# Altium PCB MyECGPCB_V1.2.9.PcbDoc (part 2 of 2)
Units mil, origin at the board's own origin, x right, y up, seen from the top; angles counter-clockwise.
Board outline 3250 x 3250 mil, 2 copper layers (Top Layer, Bottom Layer); 151 components, 107 nets, 475 pads, 167 vias.
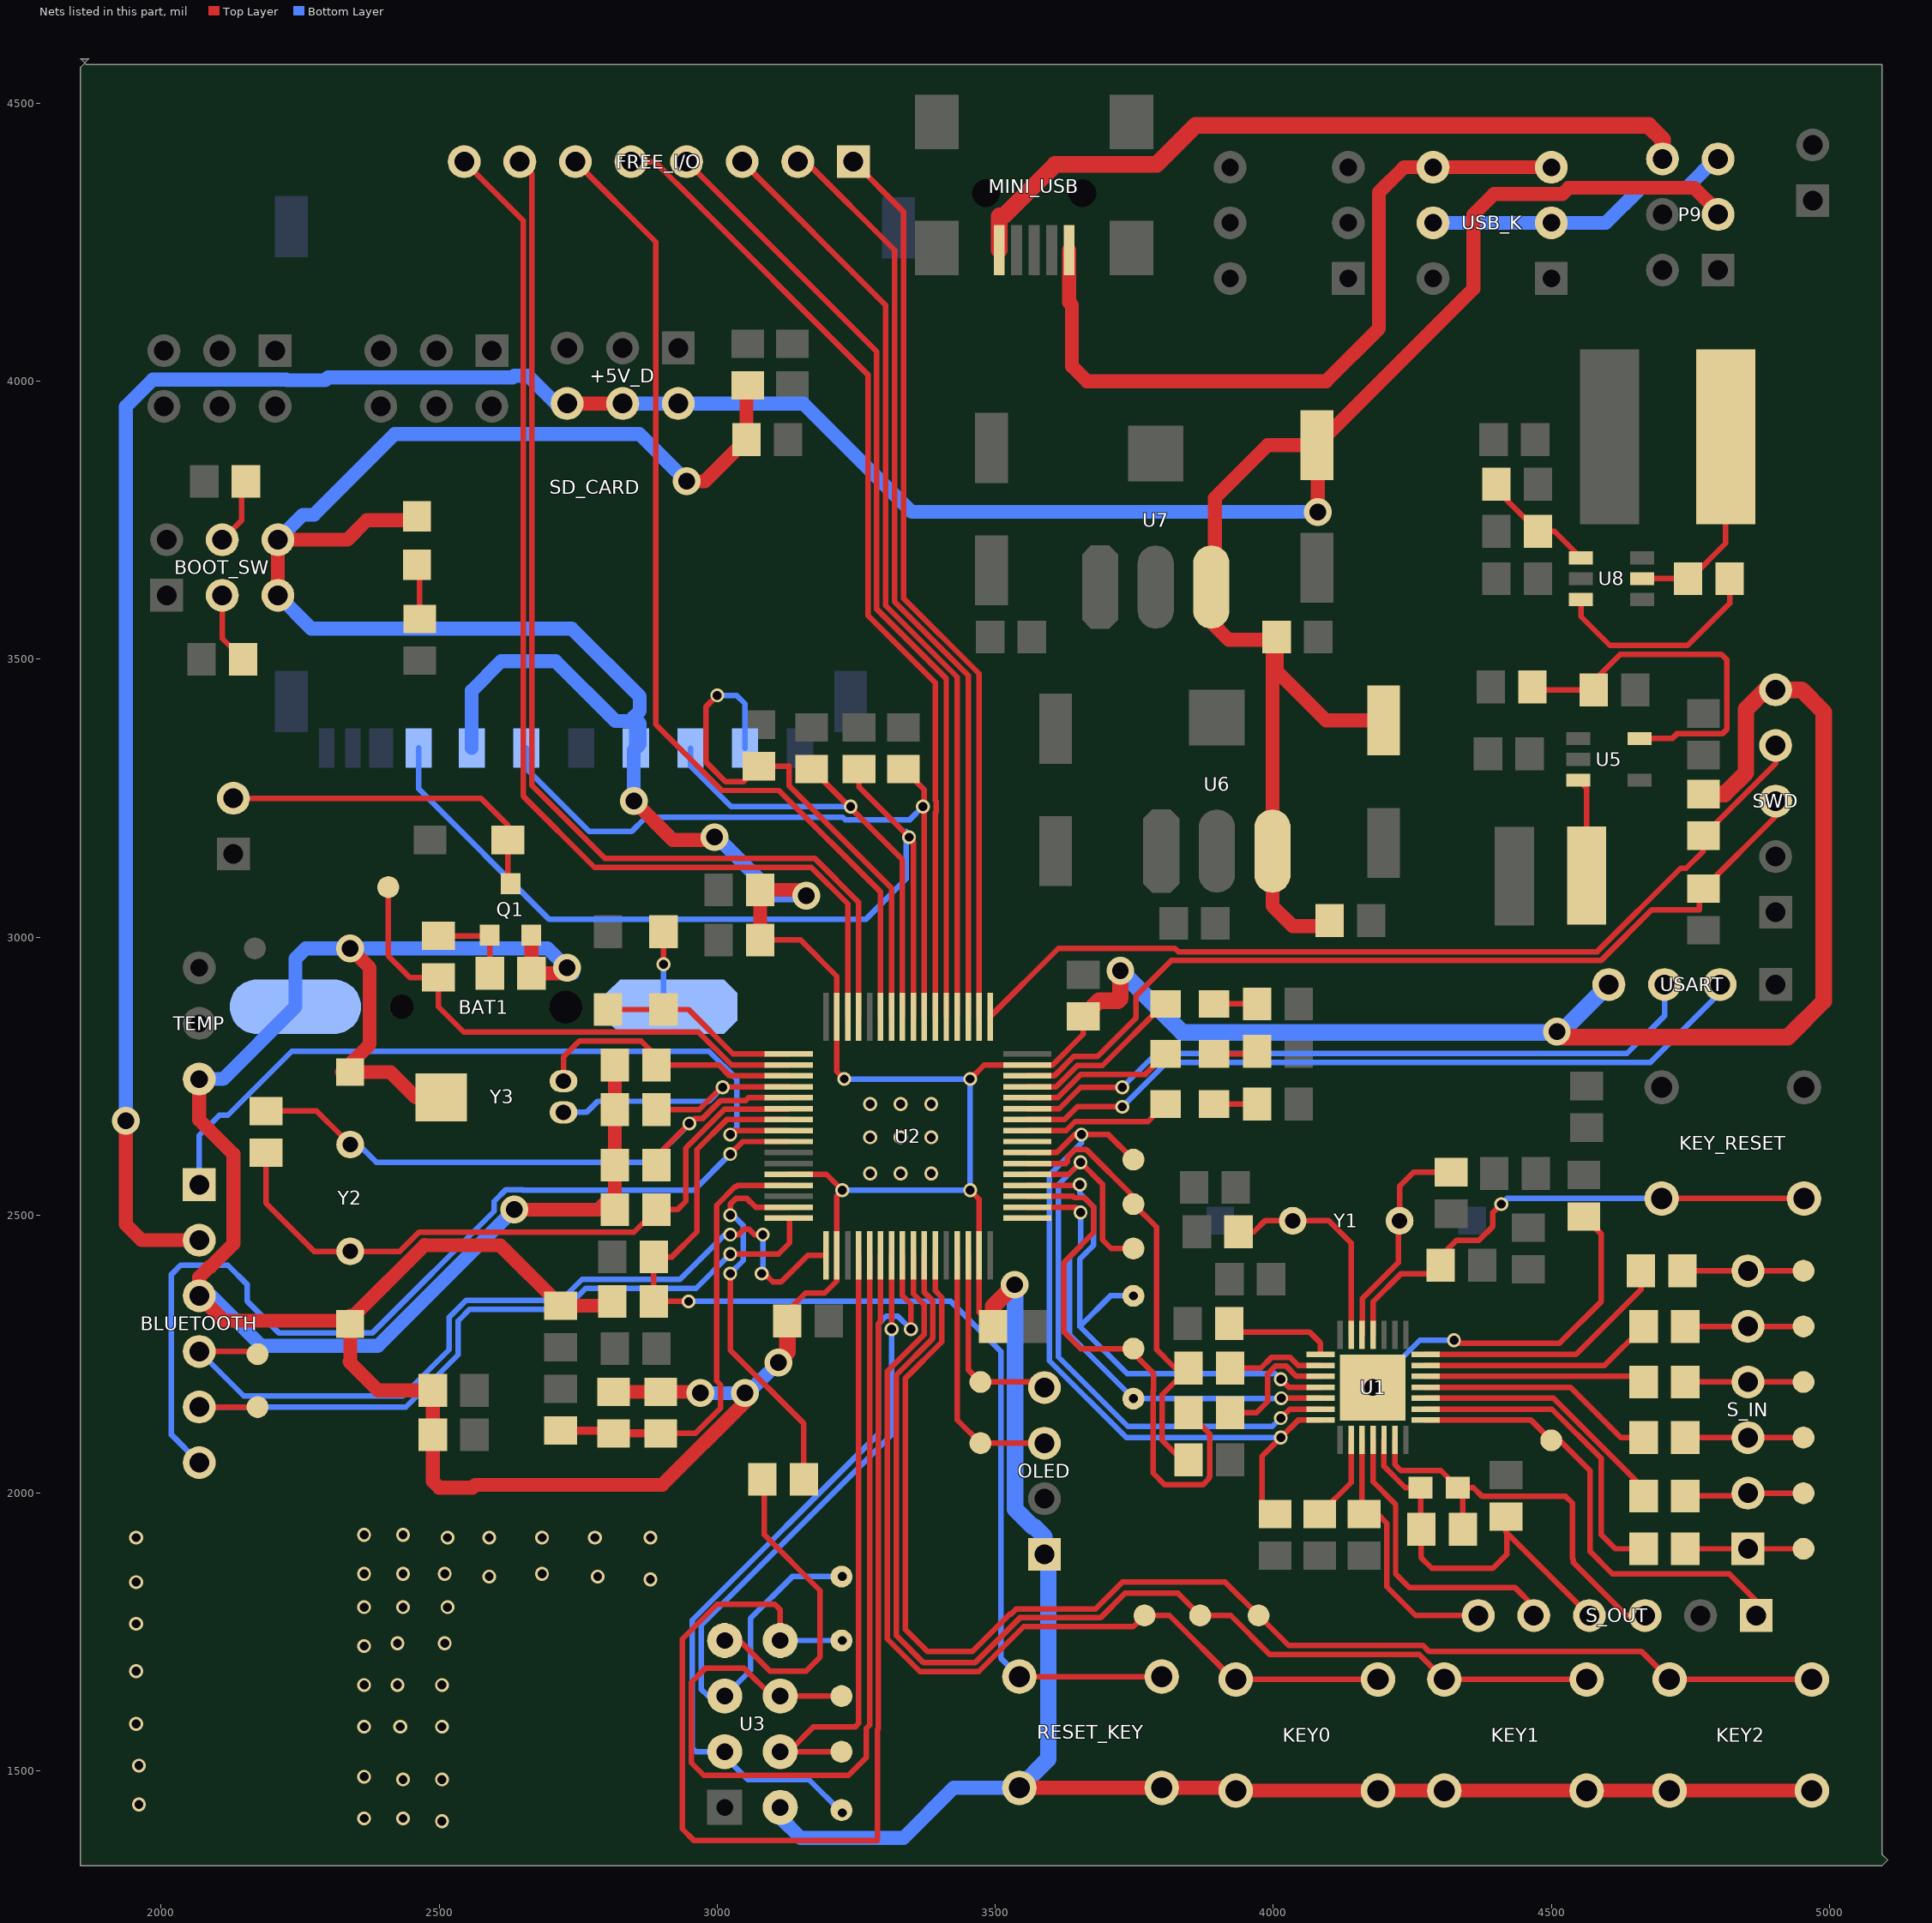
[diagram p2: the nets of this part, all layers, seen from the top]

## Via types
v1: diameter 25, hole 16, Top Layer to Bottom Layer, 114 vias
v2: diameter 50, hole 30, Top Layer to Bottom Layer, 53 vias

## Nets (pads, with @x,y where several pads share a name; then routed paths per layer and width w, separated by ;. In a path a pad name is that pad's centre, name@x,y a point inside that pad or via, vN(x,y) a via of type N, cw(c..) or ccw(c..) an arc to the next point about the centre after c; other vN are vias at no path point) (continued)
DGND: BAT1.2 BLUETOOTH.3 BOOT_SW.5 BOOT_SW.6 C9.2 C10.2 C11.2 C12.1 C13.1 C14.1 C15.1 C16.2 C17.2 C18.2 C19.2 C20.2 C21.1 C22.1 C23.1 C24.1 KEY0.1 KEY1.1 KEY2.1 OLED.1 POWER.2 Q1.1 R26.2 R35.2 R36.1 RESET_KEY.2 SD_CARD.3 SD_CARD.6 SWD.5 TEMP.1 U2.12 U2.18 U2.31 U2.47 U2.63 U3.1 USART.4 Y2. Y3. | length 16230.3
  Top Layer w10: C18.2@3077.4,2995 3150,2995 3215.11,2929.89 U2.63@3215.11,2856.93 3215.11,2758.39 v1(3228.5,2745) ; C23.1@3126.1,2310 3126.1,2327.6 3158.5,2360 3193.5,2360 3215.11,2381.61 U2.18@3215.11,2427.8 3215.11,2535.11 v1(3225,2545) 3196.54,2573.46 U2.12@3128.5,2573.46 ; v1(3455,2545) 3471.02,2528.98 U2.31@3471.02,2427.8 3471.02,2325.08 C20.2@3496.1,2300 ; v1(3455,2745) 3480.31,2770.31 U2.47@3557.63,2770.31 3603.3,2770.31 3658.5,2825.51 C19.2@3658.5,2857.6
  Top Layer w25: TEMP.1@2068.5,2745 2068.5,2671.5 2130,2610 2130,2448.58 2088.39,2406.97 2086.97,2406.97 2068.5,2388.5 BLUETOOTH.3@2068.5,2355 2113.5,2310 2330.32,2310 Y2.@2340,2319.68 ; BOOT_SW.5@2210,3605 BOOT_SW.6@2210,3715 2335,3715 2370,3750 2453.02,3750 POWER.2@2460.06,3757.04 ; v2(2340,2980) 2375,2945 2375,2807.44 2325,2757.44 2412.56,2757.44 2458,2712 Y3.@2503.5,2712 ; v2(2635,2510) 2786.1,2510 2801.1,2525 C12.1@2816.1,2510 C15.1@2816.1,2590 C13.1@2816.1,2690 C14.1@2816.1,2770 ; Q1.1@2665.9,3003.74 R35.2@2665.9,2935 2720,2935 v2(2730,2945) ; C11.2@2811.1,2345 2803.5,2337.4 C24.1@2718.5,2337.4 2609.93,2445.97 2474.03,2445.97 2473.7,2446.3 2347.08,2319.68 Y2.@2340,2319.68 ; C17.2@2813.5,2182.4 C16.2@2898.5,2182.4 2967.6,2182.4 v2(2970,2180) ; v2(2850,3245) 2920,3175 v2@2985,3175 ; v2(2945,3820) 2977.6,3820 C9.2@3052.6,3895 3052.6,3990.2 R36.1@3055,3992.6 ; v2(3050,2180) 3050,2163.68 2901.32,2015 2565,2015 2560,2010 2500,2010 2488.5,2021.5 C22.1@2488.5,2105 C21.1@2488.5,2185 2390,2185 2338.5,2236.5 2340,2238 Y2.@2340,2304.68 Y2.@2340,2319.68 ; C18.2@3077.4,2995 C10.2@3077.4,3085 3150,3085 v2(3160,3075) ; RESET_KEY.2@3543.5,1470 RESET_KEY.2@3799.41,1470 3927.59,1470 KEY0.1@3932.59,1465 KEY0.1@4188.5,1465 KEY1.1@4307.59,1465 KEY1.1@4563.5,1465 KEY2.1@4712.59,1465 KEY2.1@4968.5,1465
  Top Layer w30: v2(3110,2235) 3110,2237.8 3126.1,2253.9 C23.1@3126.1,2310 ; C20.2@3496.1,2300 3496.1,2336.1 v2(3535,2375) ; C19.2@3658.5,2857.6 3686.71,2885.81 3720.81,2885.81 3725,2890 v2(3725,2940) ; v2(4510,2830) 4520,2820 4925,2820 4990,2885 4990,3405 4950,3445 SWD.5@4903.5,3445 4885,3445 4850,3410 4850,3295.87 4811.53,3257.4 R26.2@4773.5,3257.4
  Bottom Layer w10: v1(3225,2545) v1(3455,2545) v1(3455,2745) v1@3230,2745
  Bottom Layer w25: BLUETOOTH.3@2068.5,2355 2090,2355 2180,2265 2390,2265 v2(2635,2510) ; TEMP.1@2068.5,2745 2111.48,2745 BAT1.2@2241.48,2875 2241.48,2961.48 2260,2980 v2(2340,2980) 2695,2980 v2(2730,2945) v2@2740,2935 ; BOOT_SW.5@2210,3615 2270,3555 2738.59,3555 2860.75,3432.84 2860.75,3407.16 2849.29,3395.71 2860.75,3384.25 2860.75,3347.29 SD_CARD.3@2853.82,3340.36 ; BOOT_SW.6@2210,3715 2255,3760 2275,3760 2420,3905 2860,3905 v2(2945,3820) ; SD_CARD.6@2558.54,3340.36 2558.54,3443.54 2611.5,3496.5 2709.4,3496.5 2816.9,3389 2846,3389 2853.82,3381.18 SD_CARD.3@2853.82,3340.36 ; v2(2850,3245) 2850,3336.54 SD_CARD.3@2853.82,3340.36 ; v2(2970,2180) v2(3050,2180) 3055,2180 v2(3110,2235) ; v2(2995,3180) 3000,3180 3105,3075 v2(3160,3075) ; U3.1@3113.5,1435 3113.5,1416.5 3150,1380 3335,1380 3425,1470 RESET_KEY.2@3543.5,1470
  Bottom Layer w30: v2(3535,2375) 3536,2374 3536,1971.04 3567.57,1939.47 3570.53,1939.47 3588.5,1921.5 OLED.1@3588.5,1890 3595.5,1883 3595.5,1522 RESET_KEY.2@3543.5,1470 ; v2(3725,2940) 3836,2829 4517.5,2829 USART.4@4603.5,2915
  other v1: 2505,1410 2365,1415 2435,1415 1960,1440 2435,1485 2505,1485 2365,1490 1960,1510 2365,1580 2430,1580 2505,1580 1955,1585 2365,1655 2425,1655 2505,1655 1955,1680 2365,1725 2425,1730 2510,1730 1955,1765 2365,1795 2435,1795 2515,1795 1955,1840 2880,1845 2590,1850 2785,1850 2365,1855 2435,1855 2510,1855 2685,1855 1955,1920 2515,1920 2590,1920 2685,1920 2780,1920 2880,1920 2365,1925 2435,1925 3275,2575 3330,2575 3385,2575 3275,2640 3330,2640 3385,2640 3275,2700 3330,2700 3385,2700
EN: BLUETOOTH.1 U2.8 | length 1364.7
  Top Layer w10: v1(3023.5,2645) 3030.71,2652.21 U2.8@3128.5,2652.21
  Bottom Layer w10: BLUETOOTH.1@2068.5,2545 BLUETOOTH.1@2068.5,2555 2068.5,2643.5 2077.62,2652.62 2095.88,2670.88 2105,2680 2120,2680 2235,2795 2985,2795 3035,2745 3035,2656.5 v1(3023.5,2645) v1@3020,2645
FBEEP: R34.2 T_P24.1 U2.2 | length 955.8
  Top Layer w10: T_P24.1@2408.5,3090 2408.5,2966.5 2447.4,2927.6 R34.2@2498.5,2927.6 2498.5,2875 2544.03,2829.47 2966.4,2829.47 3025.87,2770 3128.19,2770 U2.2@3128.5,2770.31
KEY0: KEY0.2 T_P14.1 U2.25 | length 1721.7
  Top Layer w10: U2.25@3352.91,2427.8 3352.91,2358.22 3372,2339.13 3372,2285.27 3306,2219.27 3306,1737.5 3364.5,1679 3470.13,1679 3551.13,1760 3748.5,1760 T_P14.1@3768.5,1780 3813.5,1780 3928.5,1665 KEY0.2@3932.59,1665 KEY0.2@4188.5,1665
KEY1: KEY1.2 T_P15.1 U2.26 | length 2095.2
  Top Layer w10: U2.26@3372.59,2427.79 3372.59,2361.16 3388,2345.75 3388,2278.64 3322,2212.64 3322,1744.13 3371.13,1695 3463.5,1695 3544.5,1776 3689.5,1776 3733.5,1820 3828.5,1820 T_P15.1@3868.5,1780 3923.5,1780 3993.5,1710 4262.59,1710 KEY1.2@4307.59,1665 KEY1.2@4563.5,1665
KEY2: KEY2.2 T_P16.1 U2.27 | length 2476
  Top Layer w10: U2.27@3392.28,2427.8 3392.28,2364.1 3404,2352.38 3404,2272.01 3338,2206.01 3338,1755.5 3378.5,1715 3458.5,1715 3525.69,1782.19 3528.06,1782.19 3537.87,1792 3680.5,1792 3728.5,1840 3913.5,1840 T_P16.1@3973.5,1780 4027.5,1726 4269.22,1726 4280.22,1715 4662.59,1715 KEY2.2@4712.59,1665 KEY2.2@4968.5,1665
LED1: DS1.2 U2.41 | length 268.7
  Top Layer w10: U2.41@3557.63,2652.21 3627.47,2652.21 3643.77,2668.5 3774.9,2668.5 DS1.2@3806.46,2700.06
LED2: DS2.2 U2.44 | length 281.5
  Top Layer w10: U2.44@3557.63,2711.26 3612.13,2711.26 3654.37,2753.5 3769.9,2753.5 DS2.2@3806.46,2790.06
LED3: DS3.2 U2.45 | length 310.6
  Top Layer w10: U2.45@3557.63,2730.95 3609.19,2730.95 3647.75,2769.5 3693,2769.5 3803.56,2880.06 DS3.2@3806.46,2880.06
NetBAT1_1: BAT1.1 D2.1 | length 141.3
  Top Layer w10: v1(2903.5,2951.5) D2.1@2903.5,3010
  Bottom Layer w10: v1(2903.5,2951.5) 2903.5,2890.15 BAT1.1@2918.65,2875
NetC6_2: C6.2 U1.24 Y1.2 | length 398.4
  Top Layer w10: U1.24@4159.76,2285 4160,2285.24 4160,2350 4225,2415 4225,2487.87 Y1.2@4227.13,2490 4227.13,2552.13 4252.4,2577.4 C6.2@4320,2577.4
NetC7_2: C7.2 U1.23 Y1.1 | length 399.5
  Top Layer w10: C7.2@3942.4,2475 C7.2@3937.4,2470 3965,2470 3985,2490 Y1.1@4035,2490 4100,2490 4140.15,2449.85 4140.15,2349.54 ; U1.23@4140.07,2285 4140.07,2349.47
NetC36_1: C36.1 L2.1 U8.2 | length 367.7
  Top Layer w10: U8.2@4663.62,3645 4750,3645 4813.5,3708.5 L2.1@4813.5,3900
NetC36_2: C36.2 U8.6 | length 395.4
  Top Layer w10: U8.6@4553.38,3607.6 4553.38,3576.62 4605,3525 4745,3525 4820.9,3600.9 C36.2@4820.9,3645
NetD3_1: BEEP.2 D3.1 Q1.3 | length 620.9
  Top Layer w10: BEEP.2@2130,3250 2575,3250 2623.5,3201.5 D3.1@2623.5,3175 2623.5,3101.26 Q1.3@2628.5,3096.26
NetDS0_1: POWER.1 R32.1 | length 99.7
  Top Layer w10: POWER.1@2460.06,3670.03 2465,3665.09 R32.1@2465,3572.4
NetDS1_1: DS1.1 R27.2 | length 77.7
  Top Layer w10: DS1.1@3893.47,2700.06 3971.04,2700.06 R27.2@3971.1,2700
NetDS2_1: DS2.1 R29.2 | length 79.7
  Top Layer w10: DS2.1@3893.47,2790.06 3966.16,2790.06 R29.2@3971.1,2795
NetDS3_1: DS3.1 R30.2 | length 77.7
  Top Layer w10: DS3.1@3893.47,2880.06 3971.04,2880.06 R30.2@3971.1,2880
NetL1_1: L1.1 U5.3 | length 177.9
  Top Layer w10: U5.3@4548.38,3282.6 4563.5,3267.48 L1.1@4563.5,3111
NetP1_1: R10.1 S_IN.1 T_P6.1 | length 212.6
  Top Layer w10: R10.1@4740.9,1900 S_IN.1@4853.5,1900 T_P6.1@4953.5,1900
NetP1_2: R9.1 S_IN.2 T_P5.1 | length 214.7
  Top Layer w10: R9.1@4740.9,1995 4848.5,1995 S_IN.2@4853.5,2000 T_P5.1@4953.5,2000
NetP1_3: R8.1 S_IN.3 T_P4.1 | length 212.6
  Top Layer w10: R8.1@4740.9,2100 S_IN.3@4853.5,2100 T_P4.1@4953.5,2100
NetP1_4: R7.1 S_IN.4 T_P3.1 | length 212.6
  Top Layer w10: R7.1@4740.9,2200 S_IN.4@4853.5,2200 T_P3.1@4953.5,2200
NetP1_5: R5.1 S_IN.5 T_P2.1 | length 212.6
  Top Layer w10: R5.1@4740.9,2300 S_IN.5@4853.5,2300 T_P2.1@4953.5,2300
NetP1_6: R3.1 S_IN.6 T_P1.1 | length 217.6
  Top Layer w10: R3.1@4735.9,2400 S_IN.6@4853.5,2400 T_P1.1@4953.5,2400
NetQ1_2: Q1.2 R34.1 R35.1 | length 161.9
  Top Layer w10: R34.1@2498.5,3002.4 2589.76,3002.4 Q1.2@2591.1,3003.74 R35.1@2591.1,2935
NetR2_2: R2.2 R4.1 T_P7.1 U2.38 | length 816.7
  Top Layer w10: U2.38@3557.63,2593.15 3626.65,2593.15 3630,2596.5 3630,2604.73 3643.77,2618.5 3663.23,2618.5 3748.5,2533.23 T_P7.1@3748.5,2520 3790,2478.5 3790,2258.5 3823.5,2225 R4.1@3847.6,2225 3800,2177.4 3800,2095 3835,2060 R2.2@3847.6,2060
NetR3_2: R3.2 U1.1 | length 469.3
  Top Layer w10: U1.1@4273.93,2249.57 4544.57,2249.57 4661.1,2366.1 R3.2@4661.1,2400
NetR4_2: R4.2 U1.20 | length 176.7
  Top Layer w10: R4.2@3922.4,2225 3977.64,2225 3997.14,2244.5 4029.86,2244.5 4044.48,2229.88 U1.20@4084.96,2229.88
NetR5_2: R5.2 U1.2 | length 421.2
  Top Layer w10: U1.2@4273.93,2229.88 4595.98,2229.88 R5.2@4666.1,2300
NetR6_1: R6.1 T_P8.1 U2.35 | length 1000.2
  Top Layer w10: U2.35@3557.63,2534.1 3639.92,2534.1 3642.52,2531.5 3660.23,2531.5 3677,2514.73 3677,2468.5 3623.5,2415 3623.5,2290 3653.5,2260 T_P8.1@3748.5,2260 3748.5,2251.5 3785,2215 3785,2185.03 3784,2184.03 3784,2036 3805,2015 3873.27,2015 3884.19,2025.92 3884.19,2028.38 3885.81,2030 3885.81,2106.79 R6.1@3847.6,2145
NetR6_2: R6.2 U1.19 | length 234
  Top Layer w10: R6.2@3922.4,2145 3970,2145 3990,2165 3990,2214.73 4003.77,2228.5 4023.23,2228.5 4041.73,2210 4084.76,2210 U1.19@4084.96,2210.2
NetR7_2: R7.2 U1.3 | length 396.4
  Top Layer w10: U1.3@4273.93,2210.2 4655.9,2210.2 R7.2@4666.1,2200
NetR8_2: R8.2 U1.4 | length 429.7
  Top Layer w10: U1.4@4273.93,2190.51 4534.49,2190.51 4625,2100 R8.2@4666.1,2100
NetR9_2: R9.2 U1.5 | length 473.1
  Top Layer w10: U1.5@4273.93,2170.83 4504.17,2170.83 4666.1,2008.9 R9.2@4666.1,1995
NetR10_2: R10.2 U1.6 | length 576.7
  Top Layer w10: U1.6@4273.93,2151.14 4501.23,2151.14 4590,2062.37 4590,1925 4615,1900 R10.2@4666.1,1900
NetR11_1: R11.1 T_P10.1 U1.15 U2.39 | length 1372.3
  Top Layer w10: U2.39@3557.63,2612.83 3610.73,2612.83 3642.89,2645 v1(3655,2645) 3703.5,2645 T_P10.1@3748.5,2600 ; R11.1@4003.5,1962.4 3980,1985.9 3980,2066.5 v1(4013.5,2100) 4044.96,2131.46 U1.15@4084.96,2131.46
  Bottom Layer w10: v1(3655,2645) 3655,2629.73 3597.5,2572.23 3597.5,2238.31 3735.81,2100 v1(4013.5,2100)
NetR14_2: R14.2 U1.21 | length 199
  Top Layer w10: R14.2@3920.9,2305 3935.9,2290 4065,2290 4085,2270 U1.21@4084.96,2249.57 U1.21@4084.96,2249.57
NetR15_1: R15.1 U1.13 | length 157.1
  Top Layer w10: R15.1@4083.5,1962.4 4140.07,2018.98 U1.13@4140.07,2096.02
NetR17_1: R17.1 U1.29 | length 645.5
  Top Layer w10: v1(4325,2275) 4330,2270 4515,2270 4590,2345 4590,2466.1 R17.1@4558.5,2497.6
  Bottom Layer w10: v2(4178.5,2190) 4263.5,2275 v1(4325,2275)
NetR21_1: BOOT_SW.3 R21.1 | length 141.2
  Top Layer w10: BOOT_SW.3@2110,3615 2110,3537.4 R21.1@2147.4,3500 R21.1@2155,3507.6
NetR22_2: BOOT_SW.4 R22.2 | length 122.6
  Top Layer w10: BOOT_SW.4@2110,3715 2145,3750 2145,3812.6 R22.2@2152.4,3820
NetR33_1: R33.1 U3.8 | length 567.7
  Top Layer w10: U3.8@3013.5,1735 3040,1735 3095,1680 3160,1680 3185,1705 3185,1825 3085,1925 3085,2021.1 R33.1@3081.1,2025
NetR38_1: R38.1 R39.2 U5.5 | length 681.4
  Top Layer w10: R38.1@4465.9,3450 4470.9,3445 R39.2@4576.1,3445 4576.1,3461.1 4624,3509 4806,3509 4816,3499 4816,3374.23 4807.58,3365.81 4725.81,3365.81 4717.4,3357.4 U5.5@4658.62,3357.4
NetR40_1: R40.1 R41.2 U8.4 | length 213.2
  Top Layer w10: R40.1@4401.1,3815 4401.1,3804.8 R41.2@4475.9,3730 4505.78,3730 U8.4@4553.38,3682.4
NetT_P9_1: T_P9.1 U1.18 U2.36 | length 971.5
  Top Layer w10: U2.36@3557.63,2553.78 3651.03,2553.78 v1(3652.25,2555) ; v1(4013.5,2205) 4027.99,2190.51 U1.18@4084.96,2190.51
  Bottom Layer w10: v1@3648.5,2555 v1(3652.25,2555) 3652.25,2539.48 3677,2514.73 3677,2445.87 3652.25,2421.12 3652.25,2300 ; v1(3748.5,2355) 3707.25,2355 3652.25,2300 ; v1(4013.5,2205) 4003.5,2215 3737.25,2215 3652.25,2300
NetT_P11_1: T_P11.1 U1.16 U2.37 | length 1225.3
  Top Layer w10: U2.37@3557.63,2573.46 3631.96,2573.46 v1(3653.5,2595) 3693,2555.5 3693,2455.5 3708.5,2440 T_P11.1@3748.5,2440 ; v1(4013.5,2135) 4029.64,2151.14 U1.16@4084.96,2151.14
  Bottom Layer w10: v1(3653.5,2595) 3613.5,2555 3613.5,2244.94 3738.44,2120 3998.5,2120 v1(4013.5,2135)
NetT_P12_1: T_P12.1 U1.17 U2.34 | length 840.2
  Top Layer w10: U2.34@3557.63,2514.41 3644.09,2514.41 v1(3653.5,2505) ; v1(3748.5,2170) T_P12.1@3748.5,2185 ; v1(4014.33,2170.83) U1.17@4084.96,2170.83
  Bottom Layer w10: v1(3653.5,2505) 3653.5,2445 3633.5,2425 3633.5,2285 3742.94,2175.56 v1@3748.5,2175.56 ; v1(3748.5,2170) 4013.5,2170 v1(4014.33,2170.83)
NRF_CE: T_P21.1 U2.20 U3.3 | length 1098.9
  Top Layer w10: U3.3@3113.5,1535 U3.3@3128.5,1535 ; T_P21.1@3223.5,1535 U3.3@3128.5,1535 ; U2.20@3254.48,2427.8 3254.48,1585.98 3248.5,1580 3173.5,1580 U3.3@3128.5,1535
NRF_CS: T_P22.1 U2.24 U3.4 | length 1438.1
  Top Layer w10: U2.24@3333.22,2427.8 3333.22,2355.28 3348.5,2340 v1(3348.5,2295)
  Bottom Layer w10: v1(3225,1425) 3165,1485 3055,1485 3013.5,1526.5 U3.4@3013.5,1535 2961.89,1535 2955,1541.88 2955,1771.5 3290,2106.5 3290,2304.73 3303.77,2318.5 3325,2318.5 v1(3348.5,2295)
NRF_IRQ: R33.2 U2.15 | length 687.8
  Top Layer w10: v1(3023.5,2395) 3023.5,2257.41 3155.9,2125.01 R33.2@3155.9,2025 ; v1(3023.5,2500) 3023.5,2520 3033.5,2530 3053.5,2530 3069.09,2514.41 U2.15@3128.5,2514.41
  Bottom Layer w10: v1(3023.5,2395) 3047,2418.5 3047,2481.5 3028.5,2500 v1(3023.5,2500)
OSC32: C14.2 U2.3 Y3.2 | length 504.5
  Top Layer w10: Y3.2@2723.5,2741 2723.5,2785 2751.97,2813.47 2863.5,2813.47 2890.9,2786.07 C14.2@2890.9,2770 ; C14.2@2890.9,2750 2910.9,2770 3003.25,2770 3022.62,2750.63 U2.3@3128.5,2750.63
OSC33: C13.2 U2.4 Y3.1 | length 559.7
  Top Layer w10: C13.2@2890.9,2690 2967.38,2690 3008.33,2730.94 U2.4@3128.5,2730.94
  Bottom Layer w10: Y3.1@2723.5,2685 2765,2685 2785,2705 2985,2705 v1(3010,2730)
OSCIN: C15.2 R28.2 U2.5 Y2.2 | length 1120
  Top Layer w10: R28.2@2188.5,2687.4 2279.72,2687.4 2325,2642.13 Y2.2@2340,2642.13 ; C15.2@2886.77,2590 C15.2@2890.9,2590 2890.9,2605.9 2959,2674 2974.01,2674 3006.51,2706.5 3051.5,2706.5 3056.26,2711.26 U2.5@3128.5,2711.26
  Bottom Layer w10: Y2.2@2347.12,2635 2387.12,2595 2880,2595 v1(2950,2665)
OSCOUT: C12.2 R28.1 U2.6 Y2.1 | length 1229.6
  Top Layer w10: R28.1@2188.5,2612.6 2188.5,2521.5 2275,2435 2429.17,2435 2463.97,2469.8 2483.43,2469.8 2483.76,2469.47 2850.37,2469.47 C12.2@2890.9,2510 2928.5,2510 2943.5,2525 2943.5,2620.86 3013.14,2690.5 3127.42,2690.5 U2.6@3128.5,2691.58
PA15: FREE_I/O.1 U2.50 | length 1631.7
  Top Layer w10: FREE_I/O.1@3245,4395 3335,4305 3335,3610 3471.02,3473.98 U2.50@3471.02,2856.93
PB7: FREE_I/O.6 U2.59 | length 1825.5
  Top Layer w10: FREE_I/O.6@2745,4395 2889.47,4250.53 2889.47,3382.9 3008.37,3264 3111,3264 3293.85,3081.15 U2.59@3293.85,2856.93
PB8: FREE_I/O.7 U2.61 | length 2011.6
  Top Layer w10: FREE_I/O.7@2645,4395 2667,4373 2667,3273 2798.47,3141.53 3175.84,3141.53 3254.48,3062.89 U2.61@3254.48,2856.93
PB9: FREE_I/O.8 U2.62 | length 2052.1
  Top Layer w10: FREE_I/O.8@2545,4395 2651,4289 2651,3254 2779.47,3125.53 3169.22,3125.53 3234.8,3059.95 U2.62@3234.8,2856.93
PB12: U2.33
PC9: U2.40
PC10: FREE_I/O.2 U2.51 | length 1673.7
  Top Layer w10: FREE_I/O.2@3145,4395 3160,4395 3319,4236 3319,3603.37 3451.33,3471.04 U2.51@3451.33,2856.93
PC11: FREE_I/O.3 U2.52 | length 1698.2
  Top Layer w10: FREE_I/O.3@3045,4395 3303,4137 3303,3596.75 3431.65,3468.1 U2.52@3431.65,2856.93
PC12: FREE_I/O.4 U2.53 | length 1731.5
  Top Layer w10: FREE_I/O.4@2945,4395 3287,4053 3287,3590.12 3411.96,3465.15 U2.53@3411.96,2856.93
PD2: FREE_I/O.5 U2.54 | length 1791
  Top Layer w10: FREE_I/O.5@2845,4395 2887.69,4395 2928.21,4354.47 2928.6,4354.47 3271,4012.08 3271,3579 3392.28,3457.72 3392.28,3245.95 3393.5,3244.73 3393.5,3225.27 3392.28,3224.05 U2.54@3392.28,2856.93
RESET: C11.1 R18.1 RESET_KEY.1 U2.7 | length 2031.4
  Top Layer w10: v1(2948.5,2345) C11.1@2885.9,2345 R18.1@2885.9,2425 2918.5,2425 2963.5,2470 2963.5,2618.23 3017.16,2671.89 U2.7@3128.5,2671.89 ; RESET_KEY.1@3543.5,1670 RESET_KEY.1@3799.41,1670
  Bottom Layer w10: v1@2945,2345 v1(2948.5,2345) 3420,2345 3510,2255 3510,1703.5 RESET_KEY.1@3543.5,1670
RLDIN: S_OUT.5 U1.11 | length 547.1
  Top Layer w10: U1.11@4179.44,2096.02 4179.44,2020.56 4220.03,1979.97 4220.03,1854.97 4245,1830 4435,1830 4468.5,1796.5 S_OUT.5@4468.5,1780
RLDINV: C4.2 R12.1 R13.1 S_OUT.4 U1.10 | length 706.4
  Top Layer w10: U1.10@4199.13,2096.02 4199.13,2048.24 4237.37,2010 C4.2@4265.04,2010 4265.04,1936.06 R13.1@4266.1,1935 4266.1,1883.9 4285,1865 4395,1865 4420,1890 4420,1928.5 ; R12.1@4418.5,1957.6 4418.5,1930 4420,1928.5 ; S_OUT.4@4568.5,1780 4420,1928.5
RLDOUT: C4.1 R13.2 S_OUT.3 U1.9 | length 747.1
  Top Layer w10: U1.9@4218.81,2096.02 4218.81,2051.18 4229.31,2040.69 4301.28,2040.69 C4.1@4331.96,2010 ; R13.2@4340.9,1935 4340.9,2001.06 C4.1@4331.96,2010 ; S_OUT.3@4668.5,1780 4635,1780 4540,1875 4540,1879.75 4538,1881.75 4538,1982 4525.81,1994.19 4375.81,1994.19 4360,2010 C4.1@4331.96,2010
RLDREF: C5.1 S_OUT.6 U1.12 | length 482.6
  Top Layer w10: U1.12@4159.76,2096.02 4159.76,1966.14 C5.1@4163.5,1962.4 4187.6,1962.4 4204.03,1945.97 4204.03,1831.88 4255.91,1780 S_OUT.6@4368.5,1780
RSTB: KEY_RESET.2 R16.1 U1.25 | length 935.3
  Top Layer w10: U1.25@4179.44,2285 4179.44,2344.45 4230,2395 4286.1,2395 R16.1@4301.1,2410 4301.1,2426.1 4330,2455 4370,2455 4395,2480 4395,2505 v1(4410,2520) ; KEY_RESET.2@4698.5,2530 KEY_RESET.2@4954.41,2530
  Bottom Layer w10: v1(4410,2520) 4420,2530 KEY_RESET.2@4698.5,2530
SCL: OLED.3 T_P27.1 U2.29 | length 470.1
  Top Layer w10: U2.29@3431.65,2427.79 3431.65,2131.85 T_P27.1@3473.5,2090 OLED.3@3588.5,2090
SD_CS: R19.1 SD_CARD.1 U2.58 | length 966.8
  Top Layer w10: v1(3000,3435) 2980,3415 2980,3315 3015,3280 3047.4,3280 R19.1@3075,3307.6 3129.47,3307.6 3129.47,3272.45 3313.54,3088.38 U2.58@3313.54,2856.93
  Bottom Layer w10: v1(3000,3435) 3035,3435 3050,3420 SD_CARD.1@3050,3340
SDA: OLED.4 T_P25.1 U2.30 | length 356.1
  Top Layer w10: U2.30@3451.33,2427.8 3451.33,2222.17 T_P25.1@3473.5,2200 3578.5,2200 OLED.4@3588.5,2190
SPI1_M0SI: T_P20.1 U2.23 U3.6 | length 1325.2
  Top Layer w10: v1(3313.5,2295) U2.23@3313.54,2427.79 U2.23@3313.54,2427.79
  Bottom Layer w10: v1(3225,1850) 3135,1850 3060,1775 3060,1681.5 U3.6@3013.5,1635 2983.5,1635 2971,1647.5 2971,1762.5 3313.5,2105 v1(3313.5,2295)
SPI1_MISO: T_P19.1 U2.22 U3.7 | length 2128.7
  Top Layer w10: U3.7@3113.5,1735 3113.5,1790 3103.5,1800 3000,1800 2937.5,1737.5 2937.5,1396 2958.5,1375 3288.5,1375 3288.5,1574.75 3290,1576.25 3290,2304.73 3293.85,2308.59 U2.22@3293.85,2427.8
  Bottom Layer w10: U3.7@3113.5,1735 v1(3225,1735)
SPI1_SCK: T_P23.1 U2.21 U3.5 | length 1689
  Top Layer w10: T_P23.1@3223.5,1635 U3.5@3113.5,1635 3098.5,1635 3048.5,1685 2978.5,1685 2953.5,1660 2953.5,1515 2976,1492.5 3236,1492.5 3268.5,1525 3268.5,1577.37 3274,1582.87 3274,2427.63 U2.21@3274.17,2427.8
SPI3_MISO: R25.1 SD_CARD.7 U2.56 | length 1649.1
  Top Layer w10: R25.1@3255,3302.6 3255,3270 3352.91,3172.09 U2.56@3352.91,2856.93
  Bottom Layer w10: SD_CARD.7@2463.07,3340.36 2463.07,3266.93 2698,3032 3267,3032 3340,3105 v1@3340,3190
  other v1: 3345,3180
SPI3_MOSI: R20.1 SD_CARD.2 U2.57 | length 863.5
  Top Layer w10: R20.1@3170,3302.6 3333.22,3139.37 U2.57@3333.22,2856.93
  Bottom Layer w10: SD_CARD.2@2952,3340 2952,3308 3025,3235 v1(3240,3235)
SPI3_SCK: R23.1 SD_CARD.5 U2.55 | length 1280.8
  Top Layer w10: R23.1@3335,3302.6 3372.59,3265 U2.55@3372.59,2856.93
  Bottom Layer w10: SD_CARD.5@2656.97,3340.36 2656.97,3303.03 2770,3190 2845.91,3190 2871.91,3216 3225.77,3216 3230.27,3211.5 3346.5,3211.5 v1(3370,3235)
STATE: BLUETOOTH.6 U2.9 | length 1697.6
  Top Layer w10: v1(3023.5,2610) 3046.02,2632.52 U2.9@3128.5,2632.52
  Bottom Layer w10: BLUETOOTH.6@2068.5,2055 2018.5,2105 2018.5,2393.5 2035,2410 2120,2410 2155,2375 2155,2345 2211.5,2288.5 2380.27,2288.5 2599,2507.23 2599,2524.91 2620.09,2546 2649.91,2546 2650.91,2545 2958.5,2545 v1(3023.5,2610)
SWCLK: R26.1 SWD.4 U2.49 | length 1655.1
  Top Layer w10: U2.49@3490.7,2856.93 3613.77,2980 3823.5,2980 3829.5,2974 4582.56,2974 4732.55,3123.99 4742.49,3123.99 4773.5,3155 R26.1@4773.5,3182.6 4903.5,3312.6 SWD.4@4903.5,3345
SWDIO: R24.1 SWD.3 U2.46 | length 1608.4
  Top Layer w10: U2.46@3557.63,2750.63 3606.25,2750.63 3641.12,2785.5 3684,2785.5 3753.5,2855 3753.5,2895.22 3816.28,2958 4589.19,2958 4680.37,3049.19 4766.1,3049.19 4766.1,3080 R24.1@4773.5,3087.4 4903.5,3217.4 SWD.3@4903.5,3245
UART1_RX: U2.43 USART.3 | length 1271.5
  Top Layer w10: U2.43@3557.63,2691.58 3615.08,2691.58 3653.5,2730 v1(3728.5,2730)
  Bottom Layer w10: v1(3728.5,2730) 3789.5,2791 4636,2791 4703.5,2858.5 USART.3@4703.5,2915
UART1_TX: U2.42 USART.2 | length 1355.4
  Top Layer w10: U2.42@3557.63,2671.89 3624.53,2671.89 3647.64,2695 v1(3728.5,2695)
  Bottom Layer w10: v1(3728.5,2695) 3808.5,2775 4678.5,2775 4803.5,2900 USART.2@4803.5,2915
UART2_RX: BLUETOOTH.5 T_P18.1 U2.16 | length 1369.7
  Top Layer w10: BLUETOOTH.5@2068.5,2155 T_P18.1@2173.5,2155 ; v1(3023.5,2430) 3110,2430 3130,2450 3130,2493.22 U2.16@3128.5,2494.73
  Bottom Layer w10: BLUETOOTH.5@2068.5,2155 2440,2155 2534,2249 2534,2309.91 2555.09,2331 2726,2331 2763.5,2368.5 2962,2368.5 v1(3023.5,2430)
UART2_TX: BLUETOOTH.4 T_P17.1 U2.17 | length 1521.7
  Top Layer w10: BLUETOOTH.4@2068.5,2255 2168.5,2255 T_P17.1@2173.5,2250 ; v1(3023.5,2465) 3038.12,2465 3048.12,2475 3057.38,2475 3067.38,2465 v1(3082,2465) v1@3085,2465 ; v1(3080,2395) 3085,2395 3100,2380 3115,2380 3162.8,2427.8 U2.17@3195.43,2427.8
  Bottom Layer w10: BLUETOOTH.4@2068.5,2255 2148.5,2175 2435,2175 2518,2258 2518,2316.54 2548.46,2347 2719.37,2347 2756.87,2384.5 2933,2384.5 v1@3013.5,2465 ; v1(3080,2395) 3082,2397 v1(3082,2465)
USB+: MINI_USB.1 USB_K.3 USB_K.4 | length 1387.2
  Top Layer w25: MINI_USB.1@3632.99,4235.94 3632.99,4142.01 3637.99,4137.01 3637.99,4027.01 3665,4000 4095,4000 4190,4095 4190,4340 4235,4385 USB_K.4@4287.4,4385 USB_K.3@4500,4385
USB+_K: P9.5 USB_K.2 USB_K.5 | length 558.8
  Bottom Layer w25: USB_K.5@4287.4,4285 USB_K.2@4500,4285 4598.03,4285 4661.06,4348.03 4743.03,4348.03 P9.5@4797.5,4402.5
USB-: MINI_USB.5 P9.6 | length 1361.8
  Top Layer w30: MINI_USB.5@3507.01,4235.94 3507.01,4296.87 3507.57,4297.43 3515.18,4297.43 3607.75,4390 3790,4390 3860,4460 4675,4460 4700,4435 P9.6@4700,4405
V+: +5V_D.2 +5V_D.4 +5V_D.6 BLUETOOTH.2 C25.1 C26.2 C28.1 C29.2 P9.3 U6.3 U7.3 | length 6485.5
  Top Layer w25: v2(1936.5,2670) 1936.5,2483.5 1965,2455 BLUETOOTH.2@2068.5,2455 ; +5V_D.6@2730,3960 +5V_D.4@2830,3960 ; v2(4080,3765) 4080,3883.5 C28.1@4078.5,3885 ; C26.2@4101.1,3030 4091.1,3020 4035,3020 3998.53,3056.47 U6.3@3998.53,3154.94 C29.2@3998.53,3532.43 ; C25.1@4198.5,3390 4095,3390 4006.1,3478.9 C29.2@4006.1,3540 C29.2@3998.53,3532.43 ; P9.3@4800,4305 4756.97,4348.03 4530.95,4348.03 4519.89,4336.97 4396.97,4336.97 4360,4300 4360,4166.5 C28.1@4078.5,3885 ; C29.2@3998.53,3532.43 3995.97,3535 3920,3535 3888.53,3566.47 U7.3@3888.53,3629.94 3895,3636.4 3895,3790 3990,3885 C28.1@4078.5,3885
  Bottom Layer w25: v2(1936.5,2670) 1936.5,3954.42 1985.11,4003.03 2224.89,4003.03 2225.95,4001.97 2295.22,4001.97 2300.22,4006.97 2632.19,4006.97 2635.22,4010 2660,4010 2710,3960 +5V_D.6@2730,3960 ; +5V_D.4@2830,3960 +5V_D.2@2930,3960 3155,3960 3350,3765 v2(4080,3765)
VBAT: D1.2 D2.2 U2.1 | length 358.1
  Top Layer w10: D1.2@2803.5,2870 D2.2@2903.5,2870 2948.5,2870 3028.5,2790 U2.1@3128.5,2790
VDDA: C16.1 C17.1 R31.1 U2.13 | length 820.7
  Top Layer w10: C16.1@2898.5,2107.6 2960.69,2107.6 3006,2152.91 3006,2194.91 2999,2201.91 2999,2518.13 3032.37,2551.5 3034.73,2551.5 3037.01,2553.78 U2.13@3128.5,2553.78
  Top Layer w15: R31.1@2718.5,2112.6 2808.5,2112.6 C17.1@2813.5,2107.6 C16.1@2898.5,2107.6
WCT: S_OUT.1 T_P13.1 U1.7 | length 840.6
  Top Layer w10: U1.7@4273.93,2131.46 4463.54,2131.46 T_P13.1@4500,2095 4515,2095 4570,2040 4570,1895 4610,1855 4820,1855 4868.5,1806.5 S_OUT.1@4868.5,1780
pads on no net: BAT1.0 BAT_K.1 BAT_K.6 MINI_USB.2 MINI_USB.3 MINI_USB.4 MINI_USB.6 MINI_USB.7 MINI_USB.8 MINI_USB.9 MINI_USB.MH1 MINI_USB.MH2 SD_CARD.8 SD_CARD.9 SD_CARD.10 SD_CARD.11 SD_CARD.12 U2.11 U2.14 USB_K.1 USB_K.6 Y1.

## Polygon pours and split planes (outlines as drawn)
DGND on Top Layer "Top Layer-DGND" (solid, remove dead copper, pour order 68): 1855,4575 1860,4580 3290,4580 3290,3609.75 3303,3596.75 3430,3469.75 3430,3460 3430,2915 3625,2915 3625,1690 3635,1680 3640,1675 5105,1675 5105,1330 1850,1330 1850,4580
BAT- on Top Layer "Top Layer-BAT-" (solid, remove dead copper, pour order 58): 3375,4580 5105,4580 5105,2965 5065,3005 3515,3005 3515,3460 3365,3610 3380,3625 3380,4580
AGND on Top Layer "Top Layer-AGND" (solid, remove dead copper, pour order 56): 5105,2870 5100,2865 4120,2865 4120,2600 4125,2595 4100,2620 3695,2620 3695,1740 3710,1725 5105,1725 5105,2865
BAT- on Bottom Layer "Bottom Layer-BAT-" (solid, remove dead copper, pour order 62): 3375,4580 5105,4580 5105,2965 5100,2960 3525,2960 3525,3440 3500,3465 3365,3600 3365,3610 3365,4575 3370,4580
AGND on Bottom Layer "Bottom Layer-AGND" (solid, remove dead copper, pour order 64): 5105,2865 5100,2870 4130,2870 4130,2595 3720,2595 3720,1730 5105,1730 5105,2865
DGND on Bottom Layer "Bottom Layer-DGND" (solid, remove dead copper, pour order 66): 1850,4580 3285,4580 3285,3615 3310,3590 3455,3445 3475,3445 3475,2945 3470,2940 3490,2920 4080,2920 4080,2685 4090,2675 4070,2695 3650,2695 3650,1690 5105,1690 5105,1330 5095,1340 1850,1340 1850,4580

## Keep-outs
Keep-Out Layer:
  lines w10: 5105,1330 1850,1330 1850,4580 5105,4580 5105,1335

## Other copper
Top Layer:
  rectangle net BAT-: 3880,2350 3950,2415
  rectangle net BAT-: 3810,2270 3880,2415
  rectangle net BAT-: 4085,2075 4125,2120
  rectangle net BAT-: 4010,2030 4125,2075
  rectangle net BAT-: 4525,2695 4990,2775
  rectangle net +3.3V_A: 4250,2645 4465,2875
  rectangle net +3.3V_D: 3960,2305 4125,2425
  rectangle net +3.3V_D: 3635,1855 3935,2000
  rectangle net +3.3V_D: 3880,1855 4115,1925
  rectangle net +2.4V_A: 4420,2350 4575,2440
  rectangle net RLDINV: 4385,1860 4495,1980
  rectangle net RLDINV: 4235,1860 4495,1890
  rectangle net RLDINV: 4235,1875 4300,2020
  rectangle net +2.4V_A: 4325,3285 4420,3330
  rectangle net +2.4V_A: 4330,2990 4505,3285
  rectangle net +2.4V_A: 4280,3330 4420,3505
  rectangle net AGND: 4625,3380 4800,3490
  rectangle net +3.3V_A: 4525,3350 4570,3405
  rectangle net +3.3V_A: 4465,3375.53 4530.26,3410
  rectangle net +3.3V_A: 4735,3300 4820,3350
  rectangle net +3.3V_A: 4640,3200 4735,3335
  rectangle net BAT+_K: 4670,3685 4740,3800
  rectangle net BAT+_K: 4630,3665 4710,3720
  rectangle net BAT_IN+: 4445,3785 4660,3965
  rectangle net BAT+_K: 4445,3610 4525,3675
  rectangle net BAT-: 4275,3865 4425,3925
  rectangle net BAT-: 4275,3720 4365,3925
  rectangle net BAT-: 4060,3520 4430,3725
  rectangle net BAT-: 3710,3065 3845,3290
  rectangle net BAT-: 4150,2990 4310,3310
  rectangle net +3.3V_A: 3575,3305 3950,3445
  rectangle net +3.3V_A: 3860,2995 3950,3450
  rectangle net V+: 3998.53,2995 4120,3115
  rectangle net BAT-: 3360,3605 3725,3770
  rectangle net +3.3V_D: 3540,3465 3840,3540
  rectangle net +3.3V_D: 3745,3480 3840,3785
  rectangle net +3.3V_D: 3385,3785 3840,3975
  rectangle net V+: 3850,3735 4130,3980
  rectangle net V+: 4006.1,3325 4200,3478.9
  rectangle net V+: 3965,3065 4045,3532.43
  rectangle net V+: 3855,3535 4035,3915

## Silkscreen, mask and mechanical layers (free items; w line width, h text height)
Top Overlay:
  drawing of 1743 lines, arcs and shapes, not listed
  text "POWER_SW" at 4625,4510 h40
  text "+" at 4960,4490 h40
  text "ECG_V1.9_ZZU_WFY" at 1930,4250 h40
  text "-" at 4965,4230 h40
  text "-" at 1880,4055 h40
  text "+" at 1885,3935 h40
  text "1" at 2210,3805 h40
  text "GND" at 2320,3585 h40 r90
  text "2" at 2210,3480 h40
  text "GND" at 4975,3425 h40
  text "CLK" at 4975,3330 h40
  text "DIO" at 4975,3230 h40
  text "VCC" at 4975,3120 h40
  text "VCC" at 4975,3020 h40
  text "EN" at 2000,2520 h40 r90
  text "V+" at 2000,2425 h40 r90
  text "V-" at 2005,2330 h40 r90
  text "TX" at 2000,2230 h40 r90
  text "SDA" at 3700,2140 h40 r90
  text "RX" at 2000,2125 h40 r90
  text "S" at 2000,2040 h40 r90
  text "SCL" at 3700,2020 h40 r90
  text "+" at 3485,1975 h40
  text "-" at 3485,1865 h40
  text "IRQ" at 2610,1720 h40
  text "MISO" at 2795,1720 h40
  text "MOSI" at 2600,1610 h40
  text "SCK" at 2805,1610 h40
  text "CE" at 2820,1515 h40
  text "CS" at 2620,1510 h40
  text "NRFL240L1" at 2215,1505 h40 r90
  text "VCC" at 2620,1415 h40
  text "GND" at 2810,1405 h40

## Text inside footprints (layer, text, board x,y; h text height)
P9: Top Overlay "1" at 4820,4120 h40 r90; Top Overlay "2" at 4715,4110 h40 r90; Top Overlay "5" at 4820,4460 h40 r90; Top Overlay "6" at 4720,4460 h40 r90
U6: Top Overlay "1" at 3780.13,3327.94 h40; Top Overlay "3" at 3960.13,3327.94 h40
U7: Top Overlay "1" at 3670.13,3802.94 h40; Top Overlay "3" at 3850.13,3802.94 h40